# Altium PCB f407_oled_display.PcbDoc
Units mm, origin at the board's own origin, x right, y up, seen from the top; angles counter-clockwise.
Board outline 105 x 80.01 mm, 2 copper layers (Top Layer, Bottom Layer), stack 1.635 mm thick; 62 components, 96 nets, 338 pads, 187 vias.
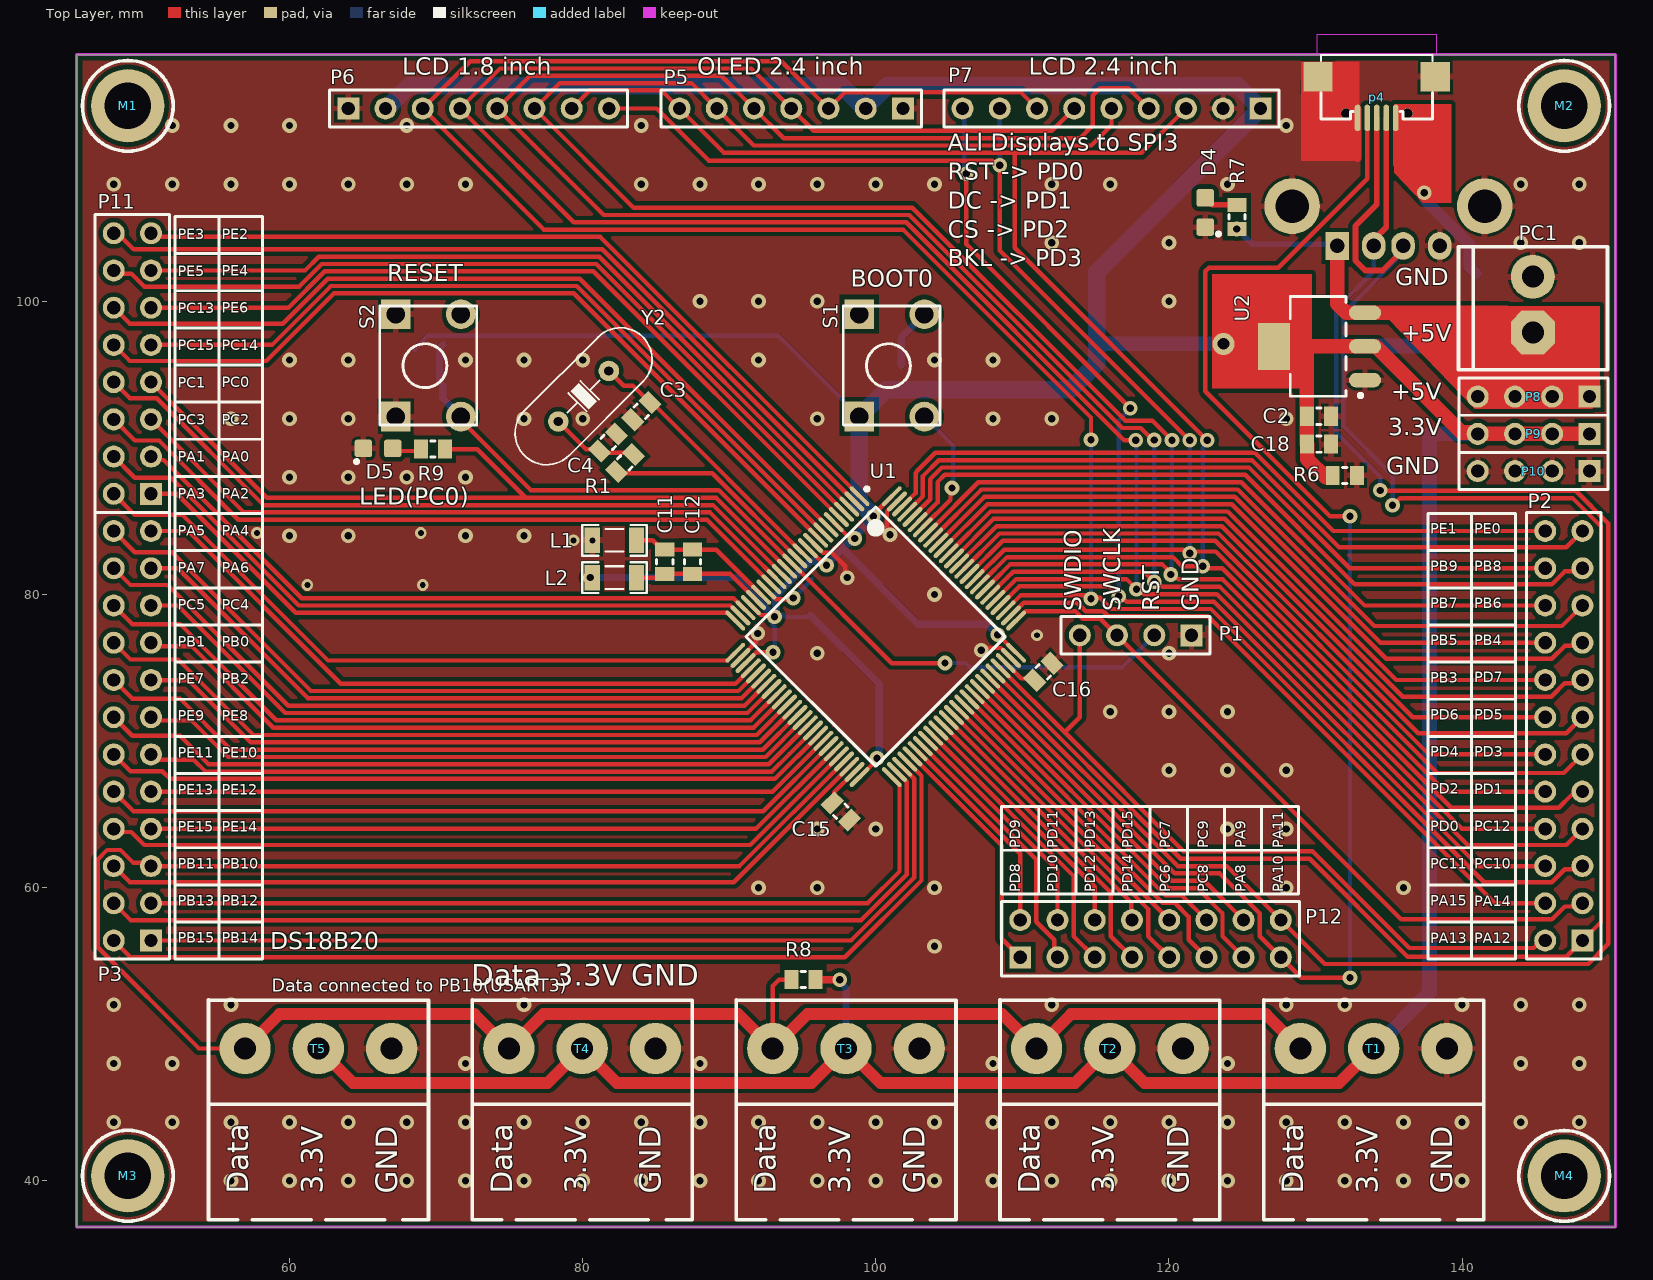
[diagram p0: Top Layer view]
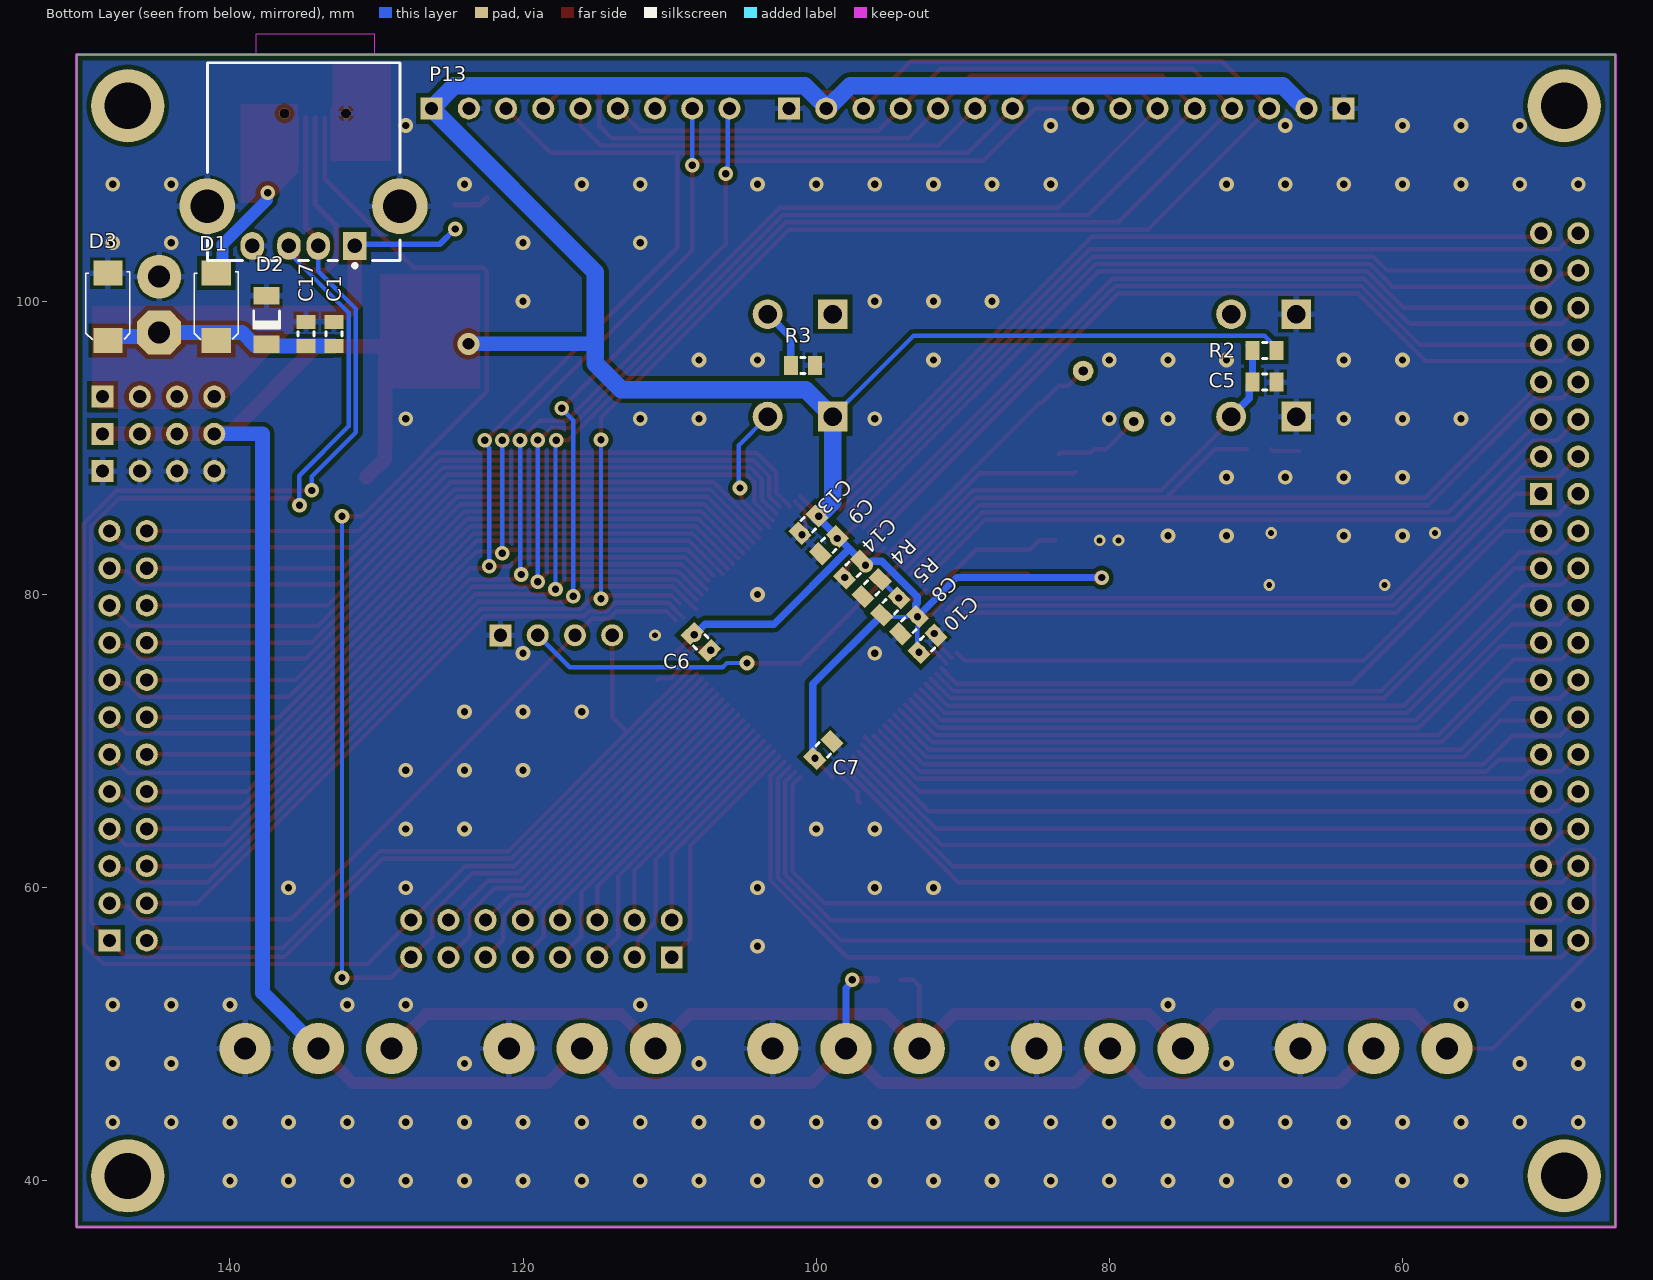
[diagram p1: Bottom Layer view, seen from below]
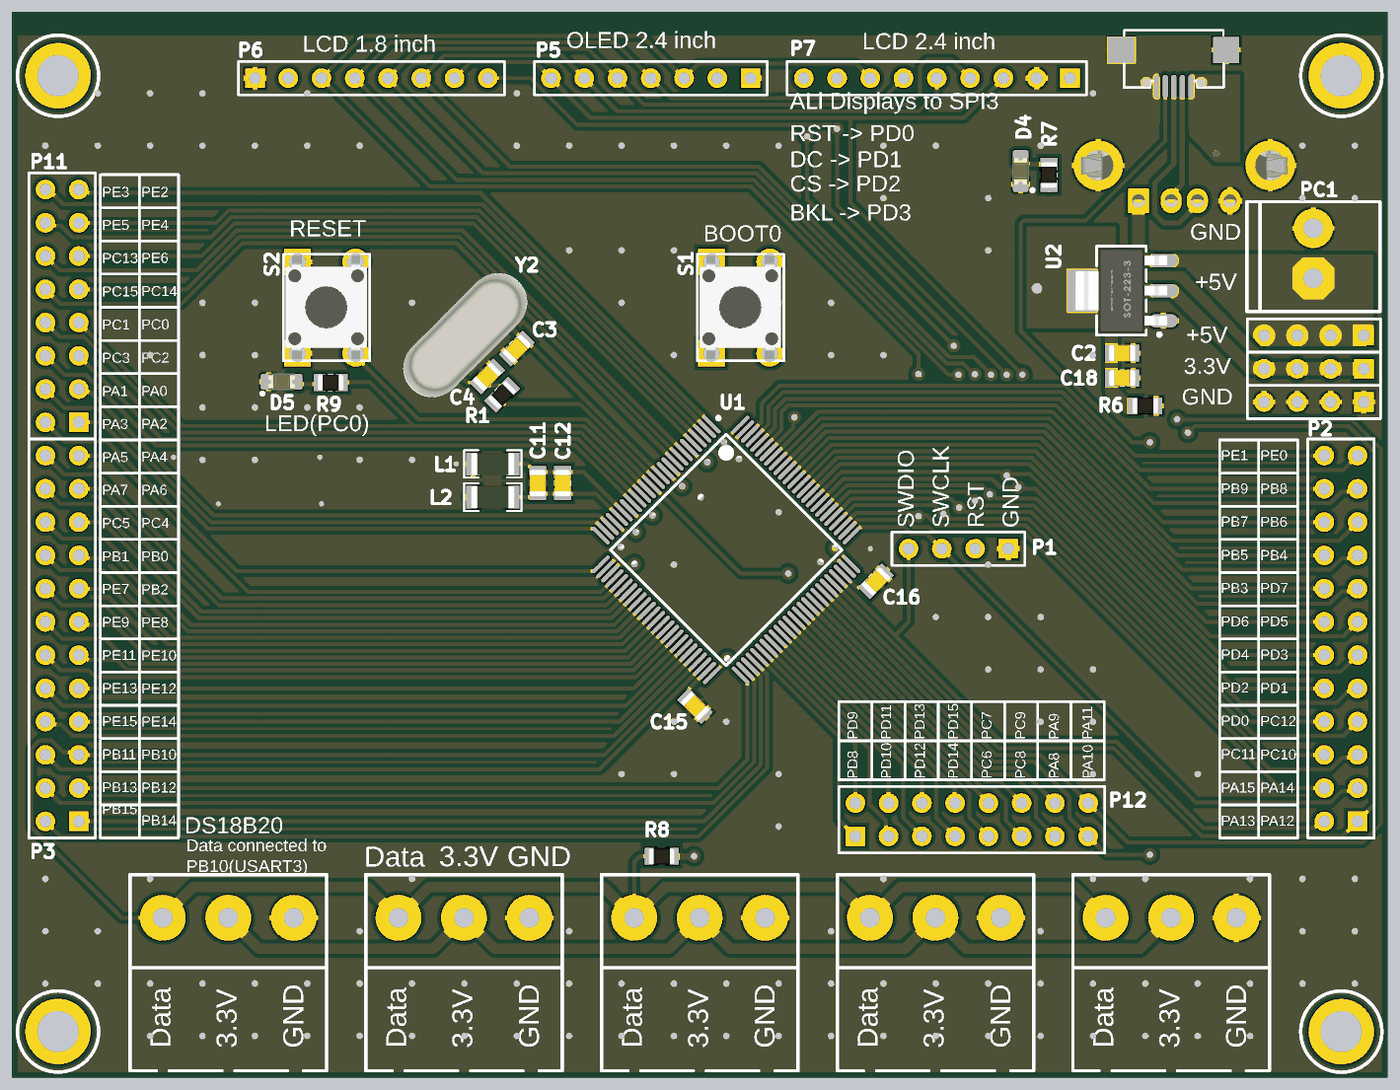
[diagram p2: 3D render of the assembled board from above, using the file's embedded part models]
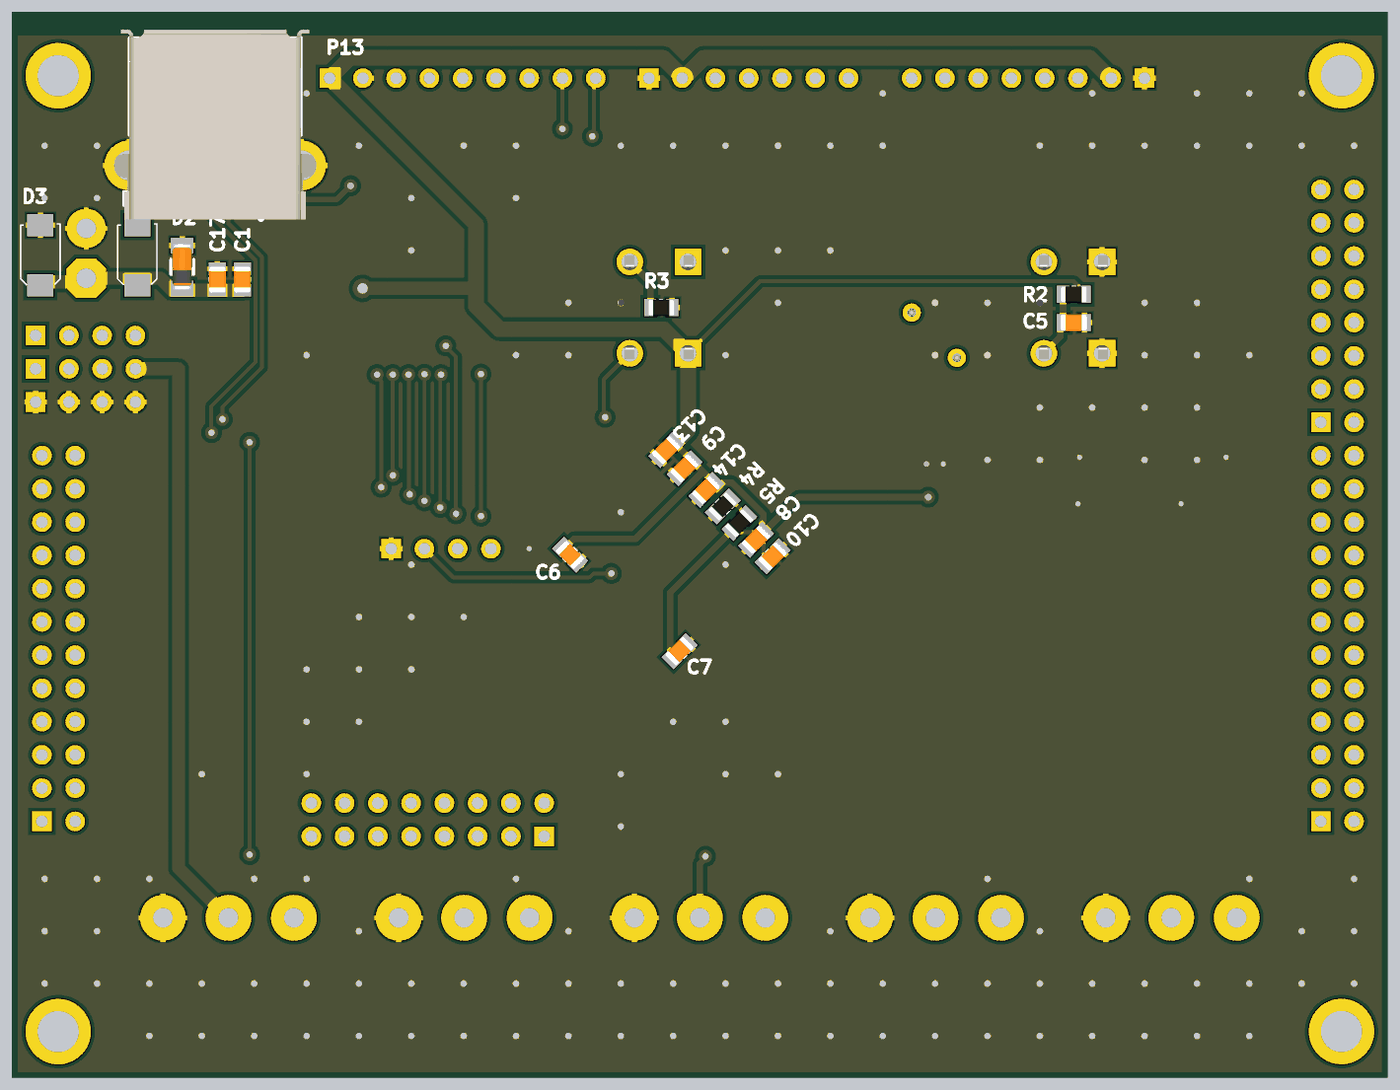
[diagram p3: 3D render of the assembled board from below, using the file's embedded part models]

## Layer stack, top to bottom
Top Solder: solder mask 0.0102, Solder Resist, Dk 3.5
Top Layer: signal copper 0.0175
Dielectric 1: dielectric 1.6, FR-4, Dk 4.8
Bottom Layer: signal copper 0.0175
Bottom Solder: solder mask 0.0102, Solder Resist, Dk 3.5

## Board outline
45.466,36.83 150.466,36.83 150.466,116.84 45.466,116.84

## Design rules (kind name [scope] priority, off if disabled: settings)
Clearance [All] p1: gap=0.2 ignorepadtopadclearanceinfootprint=FALSE except(0: Arc-Hole Track-Hole SMDPad-Hole THPad-Hole Via-Hole Fill-Hole Poly-Hole Region-Hole Text-Hole; 0.3: Arc-Fill Arc-Poly Arc-Region Track-Fill Track-Poly Track-Region SMDPad-Fill SMDPad-Poly SMDPad-Region THPad-Fill THPad-Poly THPad-Region Via-Fill Via-Poly Via-Region Fill-Fill Fill-Poly Fill-Region Poly-Poly Poly-Region Region-Region)
PolygonConnect [All] p1: thpad.connectstyle=Relief thpad.reliefconductorwidth=0.4 thpad.reliefentries=4 thpad.polygonreliefangle="90 Angle" thpad.airgapwidth=0.2 smdpad.connectstyle=Relief smdpad.reliefconductorwidth=0.4 smdpad.reliefentries=4 smdpad.polygonreliefangle="90 Angle" smdpad.airgapwidth=0.2 via.connectstyle=Direct via.reliefconductorwidth=0.254 via.reliefentries=4 via.polygonreliefangle="90 Angle" via.airgapwidth=0.254
RoomDefinition U_micro [InComponentClass('U_micro')] p1 off: confinementstyle=ConfineIn formatcopy=TRUE lockcomponents=FALSE outline 163.703,61.341 214.503,61.341 214.503,86.741 163.703,86.741
RoomDefinition U_display [InComponentClass('U_display')] p2 off: confinementstyle=ConfineIn formatcopy=TRUE lockcomponents=FALSE outline 168.529,30.861 219.329,30.861 219.329,56.261 168.529,56.261
RoomDefinition U_power [InComponentClass('U_power')] p3 off: confinementstyle=ConfineIn formatcopy=TRUE lockcomponents=FALSE outline 181.102,94.107 220.98,94.107 220.98,105.156 181.102,105.156
RoutingVias [All] p1: holewidth=0.5 width=1 viastyle="Through Hole" minholewidth=0.4 minwidth=0.8 maxholewidth=1 maxwidth=1.5
SolderMaskExpansion [All] p1: expansion=0.102 istentingtop=FALSE
Width [All] p1: maxlimit=2 minlimit=0.2 preferedwidth=0.3
30 further rules are at their usual default settings.

## Classes and differential pairs
net class PE[0..15]: PE0 PE1 PE2 PE3 PE4 PE5 PE6 PE7 PE8 PE9 PE10 PE11 PE12 PE13 PE14 PE15
net class PD[0..15]: PD0 PD1 PD2 PD3 PD4 PD5 PD6 PD7 PD8 PD9 PD10 PD11 PD12 PD13 PD14 PD15
net class PC[0..15]: PC0 PC1 PC2 PC3 PC4 PC5 PC6 PC7 PC8 PC9 PC10 PC11 PC12 PC13 PC14 PC15
net class PB[0..15]: PB0 PB1 PB2 PB3 PB4 PB5 PB6 PB7 PB8 PB9 PB10 PB11 PB12 PB13 PB14 PB15
net class PA[0..15]: PA0 PA1 PA2 PA3 PA4 PA5 PA6 PA7 PA8 PA9 PA10 PA11 PA12 PA13 PA14 PA15
component class U_power: C1 C2 C17 C18 D1 D2 D3 D4 M1 M2 M3 M4 p4 P8 P9 P10 P13 PC1 R6 R7 U2
component class U_micro: C3 C4 C5 C6 C7 C8 C9 C10 C11 C12 C13 C14 C15 C16 D5 L1 L2 P1 P2 P3 P11 P12 R1 R2 R3 R4 R5 R9 S1 S2 U1 Y2
component class U_display: P5 P6 P7 R8 T1 T2 T3 T4 T5

## Components (designator, comment, footprint, x,y, rotation, side; value= is the part's Value field where it differs from the comment)
C1 "cap 10uF" "Cap 805" 132.903,98.6 r270 bottom value=10uF
C2 "cap 22uF" "Cap 805" 131.062,92.161 r180 top value=22uF
C3 "cap 22pF" "Cap 805" 84.582,93.091 r225 top value=22pF
C4 "cap 22pF" "Cap 805" 82.32,90.956 r225 top value=22pF
C5 "cap 100nF" "Cap 805" 70.23,94.488 r180 bottom value=100nF
C6 "cap 100nF" "Cap 805" 107.291,76.176 r45 bottom value=100nF
C7 "cap 100nF" "Cap 805" 98.933,69.977 r315 bottom value=100nF
C8 "cap 100nF" "Cap 805" 94.258,77.319 r135 bottom value=100nF
C9 "cap 100nF" "Cap 805" 99.719,82.78 r135 bottom value=100nF
C10 "cap 100nF" "Cap 805" 91.821,77.216 r315 bottom value=100nF
C11 "cap 2.2uF" "Cap 805" 85.598,81.408 r90 top value=2.2uF
C12 "cap 100nF" "Cap 805" 87.503,81.408 r90 top value=100nF
C13 "cap 100nF" "Cap 805" 101.116,84.177 r135 bottom value=100nF
C14 "cap 1uF" "Cap 805" 98.068,81.129 r135 bottom value=1uF
C15 "cap 2.2uF" "Cap 805" 98.195,64.619 r135 top value=2.2uF
C16 "cap 2.2uF" "Cap 805" 112.014,75.311 r225 top value=2.2uF
C17 "cap 10uF" "Cap 805" 134.808,98.6 r270 bottom value=10uF
C18 "cap 22uF" "Cap 805" 131.062,90.256 r180 top value=22uF
D1 "1n5822" "SMA DIODE 2" 140.925,99.625 r270 bottom
D2 "Zener 5.6v" "Diode 1n4148 SMD" 137.5,100.375 r270 bottom
D3 "1n5822" "SMA DIODE 2" 148.325,99.625 r270 bottom
D4 "LED Red" 0805-LED 122.478,106.063 r270 top
D5 "LED Red" 0805-LED 66.04,89.966 r180 top
L1 "inductor 10uH" IND1206 82.169,83.693 r0 top value=10uH
L2 "inductor 10uH" IND1206 82.169,81.153 r0 top value=10uH
M1 "Spacer-ff 10mm" Screw 48.966,113.34 r0 top locked
M2 "Spacer-ff 10mm" screw 146.966,113.34 r0 top locked
M3 "Spacer-ff 10mm" screw 48.966,40.34 r0 top locked
M4 "Spacer-ff 10mm" screw 146.966,40.33 r0 top locked
P1 "Header4Pin Female" HDR1X4 121.539,77.216 r180 top
P2 "Header 12X2" HDR2X12 148.209,56.388 r90 top
P3 "Header 12X2" HDR2X12 50.546,56.388 r90 top
p4 "USB Connector" USB_AB_BM_SHS 134.176,113.916 r0 top
P5 "OLED 2.4" HDR1X7 101.854,113.157 r180 top
P6 "LCD_1.8" HDR1X8 64.008,113.157 r0 top
P7 "LCD_2.4" HDR1X9 126.238,113.157 r180 top
P8 "Header 4" HDR1X4 148.688,93.498 r180 top
P9 "Header 4" HDR1X4 148.688,90.958 r180 top
P10 "Header 4" HDR1X4 148.688,88.418 r180 top
P11 "Header 8X2" HDR2X8 50.546,86.868 r90 top
P12 "Header 8X2" HDR2X8 109.855,55.245 r0 top
P13 "USB Connector A Type Femal" USB2.5-2H4C 134.975,109.275 r90 bottom locked
PC1 "Power Connector" "My_ Power_Connector" 139.745,94.065 r90 top
R1 "Res 120R" "RES 0805 (2012X06L)" 82.296,88.392 r45 top value=120R
R2 "Res 1K" "RES 0805 (2012X06L)" 68.58,96.647 r0 bottom value=1K
R3 "Res 1K" "RES 0805 (2012X06L)" 100.077,95.631 r0 bottom value=1K
R4 "f429-f103" "RES 0805 (2012X06L)" 96.798,79.859 r135 bottom value=0R
R5 "f407" "RES 0805 (2012X06L)" 94.361,79.756 r315 bottom value=0R
R6 "Res 330R" "RES 0805 (2012X06L)" 132.825,88.125 r180 top value=330R
R7 "Res 4.7K" "RES 0805 (2012X06L)" 124.637,106.588 r270 top value=4.7K
R8 "Res 4.7K" "RES 0805 (2012X06L)" 94.234,53.721 r0 top value=4.7K
R9 "Res 4.7K" "RES 0805 (2012X06L)" 70.611,89.916 r180 top value=4.7K
S1 "Switch PB" "Switch - Push to On" 101.092,95.631 r90 top
S2 "Switch PB" "Switch - Push to On" 69.469,95.631 r90 top
T1 "Phoenix terminal" "phoenix terminal 3" 126.473,37.338 r0 top locked
T2 "Phoenix terminal" "phoenix terminal 3" 108.473,37.338 r0 top locked
T3 "Phoenix terminal" "phoenix terminal 3" 90.473,37.338 r0 top locked
T4 "Phoenix terminal" "phoenix terminal 3" 72.473,37.338 r0 top locked
T5 "Phoenix terminal" "phoenix terminal 3" 54.473,37.338 r0 top locked
U1 "STM32F103VET6" LQFP100_N 99.991,77.122 r315 top locked
U2 "AMS1117 3.3" SOT223 130.175,96.925 r180 top
Y2 "Crystal 16MHZ" "CRYSTAL Small" 80.063,93.525 r225 top

## Footprints (in the part's own frame and the unit in brackets; to place one, negate y for a bottom-side part, rotate by r counter-clockwise, add the part's x,y. Pads: shape width x height; smd on the part's side, far side on the other; paste and mask are expansions set on the pad)
0805-LED [mm]
  rrect30% 1.2x1.2 smd: A(-1,0) C(1,0)
  silkscreen extent 1.43,0.86 1.5,0.94, body extent -1.01,-0.63 1.01,0.62, height 1.1
"Cap 805" [mm]
  rect 0.95x1.3 smd: 1(0,0) 2(1.65,0)
  silkscreen extent 0.67,-0.55 0.97,0.55, body extent -0.19,-0.64 1.84,0.63, height 0.65
"CRYSTAL Small" [mil] "DESIGNER ABBAS BASEREH"
  round 55 hole 25: 1(-96.06,0) 2(96.06,0)
  silkscreen extent -225,-85 225,85, body extent -226,-89 226,89, height 142
"Diode 1n4148 SMD" [mm] "Mini MELF SOD-80"
  rect 1.2x1.75 smd: 1(0,0) 2(3.3,0)
  silkscreen extent 1.04,-0.88 2.22,0.87, body extent -0.13,-0.75 3.37,0.75, height 1.55
HDR1X4 [mm] "Connector; Header; 4 Position"
  rect 1.5x1.5 hole 0.9: 1(0,0)
  round 1.5 hole 0.9: 2(2.54,0) 3(5.08,0) 4(7.62,0)
  silkscreen extent -1.27,-1.27 8.89,1.27
HDR1X7 [mm] "Connector; Header; 7 Position"
  rect 1.5x1.5 hole 0.9: 1(0,0)
  round 1.5 hole 0.9: 2(2.54,0) 3(5.08,0) 4(7.62,0) 5(10.16,0) 6(12.7,0) 7(15.24,0)
  silkscreen extent -1.27,-1.27 16.51,1.27
HDR1X8 [mm] "Connector; Header; 8 Position"
  rect 1.5x1.5 hole 0.9: 1(0,0)
  round 1.5 hole 0.9: 2(2.54,0) 3(5.08,0) 4(7.62,0) 5(10.16,0) 6(12.7,0) 7(15.24,0) 8(17.78,0)
  silkscreen extent -1.27,-1.27 19.05,1.27
HDR1X9 [mm] "Connector; Header; 9 Position"
  rect 1.5x1.5 hole 0.9: 1(0,0)
  round 1.5 hole 0.9: 2(2.54,0) 3(5.08,0) 4(7.62,0) 5(10.16,0) 6(12.7,0) 7(15.24,0) 8(17.78,0) 9(20.32,0)
  silkscreen extent -1.27,-1.27 21.59,1.27
HDR2X8 [mm] "Connector; Header; 8x2 Position"
  rect 1.5x1.5 hole 0.9: 1(0,0)
  round 1.5 hole 0.9: 2(0,2.54) 3(2.54,0) 4(2.54,2.54) 5(5.08,0) 6(5.08,2.54) 7(7.62,0) 8(7.62,2.54) 9(10.16,0) 10(10.16,2.54) 11(12.7,0) 12(12.7,2.54) 13(15.24,0) 14(15.24,2.54) 15(17.78,0) 16(17.78,2.54)
  silkscreen extent -1.27,-1.27 19.05,3.81
HDR2X12 [mm] "Connector; Header; 12x2 Position"
  rect 1.5x1.5 hole 0.9: 1(0,0)
  round 1.5 hole 0.9: 2(0,2.54) 3(2.54,0) 4(2.54,2.54) 5(5.08,0) 6(5.08,2.54) 7(7.62,0) 8(7.62,2.54) 9(10.16,0) 10(10.16,2.54) 11(12.7,0) 12(12.7,2.54) 13(15.24,0) 14(15.24,2.54) 15(17.78,0) 16(17.78,2.54) 17(20.32,0) 18(20.32,2.54) 19(22.86,0) 20(22.86,2.54) 21(25.4,0) 22(25.4,2.54) 23(27.94,0) 24(27.94,2.54)
  silkscreen extent -1.27,-1.27 29.21,3.81
IND1206 [mm] "Chip Inductor, 2-Leads, Body 3/20x1/60mm, IPC Medium Density DESIGNER:ABBAS BASEREH"
  rect 1.04x1.74 smd: 1(-1.51,0) 2(1.51,0)
  silkscreen extent -2.2,-1.05 2.2,1.05, body extent -1.65,-0.85 1.65,0.85, height 0.94
LQFP100_N [mm] "Thin QFP, 100-Leads, Body 14x14mm, Pitch 0.5mm, IPC Medium Density"
  oval 1.8x0.3 smd: 1(-7.55,6) 2(-7.55,5.5) 3(-7.55,5) 4(-7.55,4.5) 5(-7.55,4) 6(-7.55,3.5) 7(-7.55,3) 8(-7.55,2.5) 9(-7.55,2) 10(-7.55,1.5) 11(-7.55,1) 12(-7.55,0.5) 13(-7.55,0) 14(-7.55,-0.5) 15(-7.55,-1) 16(-7.55,-1.5) 17(-7.55,-2) 18(-7.55,-2.5) 19(-7.55,-3) 20(-7.55,-3.5) 21(-7.55,-4) 22(-7.55,-4.5) 23(-7.55,-5) 24(-7.55,-5.5) 25(-7.55,-6) 51(7.55,-6) 52(7.55,-5.5) 53(7.55,-5) 54(7.55,-4.5) 55(7.55,-4) 56(7.55,-3.5) 57(7.55,-3) 58(7.55,-2.5) 59(7.55,-2) 60(7.55,-1.5) 61(7.55,-1) 62(7.55,-0.5) 63(7.55,0) 64(7.55,0.5) 65(7.55,1) 66(7.55,1.5) 67(7.55,2) 68(7.55,2.5) 69(7.55,3) 70(7.55,3.5) 71(7.55,4) 72(7.55,4.5) 73(7.55,5) 74(7.55,5.5) 75(7.55,6)
  oval 0.3x1.8 smd: 26(-6,-7.55) 27(-5.5,-7.55) 28(-5,-7.55) 29(-4.5,-7.55) 30(-4,-7.55) 31(-3.5,-7.55) 32(-3,-7.55) 33(-2.5,-7.55) 34(-2,-7.55) 35(-1.5,-7.55) 36(-1,-7.55) 37(-0.5,-7.55) 38(0,-7.55) 39(0.5,-7.55) 40(1,-7.55) 41(1.5,-7.55) 42(2,-7.55) 43(2.5,-7.55) 44(3,-7.55) 45(3.5,-7.55) 46(4,-7.55) 47(4.5,-7.55) 48(5,-7.55) 49(5.5,-7.55) 50(6,-7.55) 76(6,7.55) 77(5.5,7.55) 78(5,7.55) 79(4.5,7.55) 80(4,7.55) 81(3.5,7.55) 82(3,7.55) 83(2.5,7.55) 84(2,7.55) 85(1.5,7.55) 86(1,7.55) 87(0.5,7.55) 88(0,7.55) 89(-0.5,7.55) 90(-1,7.55) 91(-1.5,7.55) 92(-2,7.55) 93(-2.5,7.55) 94(-3,7.55) 95(-3.5,7.55) 96(-4,7.55) 97(-4.5,7.55) 98(-5,7.55) 99(-5.5,7.55) 100(-6,7.55)
  silkscreen extent -7.67,-6.25 6.25,6.82, body extent -7,-7 7,7, height 1.6
"My_ Power_Connector" [mm]
  oct 3x3 hole 1.5: 1(3.81,-5.08)
  round 3 hole 1.5: 2(7.62,-5.08)
  silkscreen extent 1.27,-10.17 9.65,-0.01
"phoenix terminal 3" [mm] "3 terminals"
  round 3.5 hole 1.5: 1(2.493,11.684) 2(7.493,11.684) 3(12.493,11.684)
  silkscreen extent 0,0 15,15
"RES 0805 (2012X06L)" [mm] "Chip Resistor, 2-Leads, Body 2.0x1.3mm, IPC High Density _ (0.100 W)"
  rect 0.95x1.3 smd: 1(0,0) 2(1.65,0)
  silkscreen extent 0.67,-0.55 0.98,0.55, body extent -0.19,-0.63 1.84,0.64, height 0.6
Screw [mm]
  round 5 hole 3.15 mask+0.1: S(0,0)
  silkscreen extent -3.1,-3.1 3.1,3.1
screw [mm]
  round 5 hole 3.15 mask+0.1: S(0,0)
  silkscreen extent -3.1,-3.1 3.1,3.1
"SMA DIODE 2" [mm]
  rect 1.7x2 smd: 1(-2.3,0) 2(2.3,0)
  silkscreen extent -2.4,-1.5 2.25,1.5, body extent -2.1,-1.3 2.1,1.3, height 0.55
SOT223 [mm] "SOT223, 4-Leads, Body 6.5x3.5mm, Pitch 2.30mm-Designer Abbas Basereh"
  oval 2.2x1 smd: 1(-3.2,2.3) 2(-3.2,0) 3(-3.2,-2.3)
  rect 2.2x3.2 smd: 4(3,0)
  Top Layer pour cut-out: -1.7,3.556 1.7,3.556 1.7,-3.556 -1.7,-3.556
  silkscreen extent -3.03,-3.4 1.9,3.47, body extent -3.5,-3.25 3.5,3.25, height 1.7
"Switch - Push to On" [mil]
  rect 80x80 hole 50: 1(-137.5,87.5) 1(137.5,87.5)
  round 80 hole 50: 2(-137.5,-87.5) 2(137.5,-87.5)
  silkscreen extent -160,-130 160,130, body extent -155,-121 157,123, height 205
USB2.5-2H4C [mm] "Connector; USB1.1, Type A, Thru-Hole; 4 Position; Right Angle DESIGNER ABBAS BASEREH"
  rect 1.9x1.6 hole 1: 1(-5.49,-3.5)
  oval 1.9x1.6 hole 1: 2(-5.49,-1) 3(-5.49,1) 4(-5.49,3.5)
  round 3.8 hole 2.3: 4(-2.78,-6.57) 4(-2.78,6.57)
  silkscreen extent -6.96,-6.57 7,6.57, body extent -6.9,-7.9 7.6,7.9, height 7.35
USB_AB_BM_SHS [mm] "USB Micro AB - Standard (Bottom mount), Shell SMT DESIGNER ABBAS BASEREH"
  oval 0.4x1.8 smd: 1(1.3,-1.4) 2(0.65,-1.4) 3(0,-1.4) 4(-0.65,-1.4) 5(-1.3,-1.4)
  rect 2x2 smd: 5(-4,1.4) 5(4,1.4)
  round 0.7 hole 0.7: H(-2.1,-1.1) H(2.1,-1.1)
  Keep-Out Layer board cut-out: -4.064,2.9 -4.064,4.291 4.064,4.291 4.064,2.9
  silkscreen extent -3.8,-1.47 3.8,2.9, body extent -4,-1.78 4,4.26, height 2.75

## Part data
C1 C2 C3 C4 C5 C6 C7 C8 C9 C10 C11 C12 C13 C14 C15 C16 C17 C18: library part Cap, "Capacitor", LatestRevisionDate=17-Jul-2002, LatestRevisionNote="Re-released for DXP Platform.", PackageDescription="Radial Cap, Thru-Hole; 2 Leads; 0.3 in Pin Spacing", PackageReference=RAD-0.3, Published=8-Jun-2000, Publisher="Altium Limited"
D1 D3: library part "Diode 1N4007", "1 Amp schottky Diode", Code_JEDEC=DO-204-AL, ComponentLink1Description="Manufacturer Link", ComponentLink1URL=http://www.fairchildsemi.com/, ComponentLink2Description=Datasheet, ComponentLink2URL=http://www.fairchildsemi.com/ds/1N%2F1N4001.pdf, DatasheetVersion=1998, LatestRevisionDate=17-Jul-2002, LatestRevisionNote="Re-released for DXP Platform.", PackageDescription="Diode, Axial; Body 5.2 x 2.7 mm (LxDia. max), Lead Dia. 0.86 mm (max)", PackageReference=DO-41, PackageVersion=Aug-1999, Published=8-Jun-2000, Publisher="Altium Limited"
D2: library part "D Zener", "Zener Diode", LatestRevisionDate=17-Jul-2002, LatestRevisionNote="Re-released for DXP Platform.", PackageDescription="Diode, Thru-Hole; 2 Leads; 0.7 in Pin Spacing", PackageReference=DIODE-0.7, Published=8-Jun-2000, Publisher="Altium Limited"
D4 D5: library part LED0, "LED SMD", LatestRevisionDate=08-Jul-2005, LatestRevisionNote="Mech Layer 1 removed.", PackageDescription="LED; 2 Leads", PackageReference=LED-0, Published=8-Jun-2000, Publisher="Altium Limited"
L1 L2: library part Inductor, "Inductor", Code_IEC=1005, Code_JEITA=0402, LatestRevisionDate=29-May-2009, LatestRevisionNote="IPC-7351 Footprint Added.", PackageDescription="Chip Inductor", PackageReference=0402-A, Published=8-Jun-2000, Publisher="Altium Limited"
M1 M2 M3 M4: library part "Board Screw", "Board Screw With Spacer"
P1: library part "Header 4", "Header, 4-Pin", LatestRevisionDate=17-Jul-2002, LatestRevisionNote="Re-released for DXP Platform.", Publisher="Altium Limited"
P2 P3: "Header, 12-Pin, Dual row", LatestRevisionDate=17-Jul-2002, LatestRevisionNote="Re-released for DXP Platform.", Publisher="Altium Limited"
p4: library part "USB MICRO", "USB Connector MICRO-B Type", Max Current=1600mA, Category=Connector, ComponentLink1Description=Datasheet, ComponentLink2Description=Reference, Designer="ABBAS BASEREH", Mounting Technology="Surface Mount\Through-Hole", Pin Count=5-7, Publisher="ABBAS BASEREH", Status=Unreleased, Update=1395-11-17
P5: library part "Header 7", "Header, 7-Pin", LatestRevisionDate=17-Jul-2002, LatestRevisionNote="Re-released for DXP Platform.", Publisher="Altium Limited"
P6: library part "Header 8", "Header, 8-Pin", LatestRevisionDate=17-Jul-2002, LatestRevisionNote="Re-released for DXP Platform.", Publisher="Altium Limited"
P7: library part "Header 9", "Header, 9-Pin", LatestRevisionDate=17-Jul-2002, LatestRevisionNote="Re-released for DXP Platform.", Publisher="Altium Limited"
P8 P9 P10: "Header, 4-Pin", LatestRevisionDate=17-Jul-2002, LatestRevisionNote="Re-released for DXP Platform.", Publisher="Altium Limited"
P11 P12: "Header, 8-Pin, Dual row", LatestRevisionDate=17-Jul-2002, LatestRevisionNote="Re-released for DXP Platform.", Publisher="Altium Limited"
P13: library part "USB A-Type", "USB Connector-A Type Femal"
PC1: "white Power Connector"
R1 R2 R3 R4 R5 R6 R7 R8 R9: library part Res1, "Resistor", LatestRevisionDate=17-Jul-2002, LatestRevisionNote="Re-released for DXP Platform.", PackageDescription="Axial Device, Thru-Hole; 2 Leads; 0.3 in Pin Spacing", PackageReference=AXIAL-0.3, Published=8-Jun-2000, Publisher="Altium Limited"
S1 S2: "Push Button Switch"
T1 T2 T3 T4 T5: library part "Phoenix terminal 3", "Terminal 3 Pin", ComponentLinkURL=www.picpars.com, Designer="Seyed Mohsen Ghasemain", E-mail=picpars@gmail.com
U1: library part STM32F103V8T6, "STM32 ARM-based 32-bit MCU with 64 Kbytes Flash, 100-pin LQFP, Industrial Temperature", ComponentLink1Description="Manufacturer Link", ComponentLink1URL=www.st.com/stm32, ComponentLink2Description=Datasheet, ComponentLink2URL=http://www.st.com/stonline/products/literature/ds/13587.pdf, DatasheetVersion="rev6, Mar-2008", PackageDescription="100-Pin Low-Profile Quad Flat Pack, 14 x 14 mm Body, 0.5 mm Pitch (LQFP100)", PackageReference=LQFP100, PackageVersion=Mar-2008, Published=30-May-2008, Publisher="Altium Limited"
U2: library part AMS1117, Package="SOT-223 Seeed Technology", Availability=Unavailable, MF="Seeed Technology", MP=AMS1117, Price=None, SnapEDA_Link=https://www.snapeda.com/parts/AMS1117/Seeed%20Technology%20Co.%2C%20Ltd/view-part/184428/?ref=snap
Y2: library part CRYSTAL, "Crystal"

## Via types
v1: diameter 1, hole 0.5, Top Layer to Bottom Layer, tented both sides, 179 vias
v2: diameter 0.8, hole 0.4, Top Layer to Bottom Layer, tented both sides, 7 vias
v3: diameter 1.5, hole 0.8, Top Layer to Bottom Layer, tented both sides, 1 vias

## Nets (pads, with @x,y where several pads share a name; then routed paths per layer and width w, separated by ;. In a path a pad name is that pad's centre, name@x,y a point inside that pad or via, vN(x,y) a via of type N, cw(c..) or ccw(c..) an arc to the next point about the centre after c; other vN are vias at no path point)
+3v3: C2.2 C6.2 C7.2 C8.2 C9.2 C10.2 C13.2 C14.2 C18.2 L2.1 P5.2 P6.2 P7.1 P9.1 P9.2 P9.3 P9.4 R2.1 R5.2 R6.2 R8.2 S1.1 T1.2 T2.2 T3.2 T4.2 T5.2 U1.6 U1.11 U1.22 U1.28 U1.50 U1.75 U1.100 U2.2 U2.4 | length 387.9
  Top Layer w0.3: U1.28 91.848,76.049 v1(92.988,76.049) ; U1.22 92.147,78.602 92.975,78.602 v1(93.091,78.486) ; U1.11 96.533,81.995 v1(96.632,81.995) ; U1.6 v1@98.109,83.954 ; U1.50 100.076,68.721 v1(100.076,68.834) ; v1(99.822,85.344) 99.822,85.438 U1.100 ; v1(108.31,77.256) 108.343,77.256 U1.75
  Top Layer w0.5: R8.2 v1(97.536,53.721)
  Top Layer w0.8: T5.2 64.316,46.672 77.616,46.672 T4.2 82.316,46.672 95.616,46.672 T3.2 100.316,46.672 113.616,46.672 T2.2 118.316,46.672 131.616,46.672 T1.2
  Top Layer w1: v1(80.518,81.153) L2.1 ; v3(123.725,97.1) 127,97.1 U2.4 129.425,96.925 ; 130.688,87.987 129.437,89.238 129.437,90.231 C18.2 C2.2 129.412,96.912 129.425,96.925 ; P9.1 P9.2 P9.3 P9.4 140.978,91.048 139.977,91.048 134.1,96.925 U2.2 129.425,96.925
  Bottom Layer w0.3: R2.1 68.58,96.822 69.405,97.647 93.361,97.647 S1.1@98.87,92.138 ; v1(92.988,76.049) 93.111,76.173 93.111,77.758 92.967,77.903 92.967,78.362 v1(93.091,78.486) ; C8.2@93.215,78.61 93.674,78.61 93.819,78.466 95.404,78.466 R5.2
  Bottom Layer w0.5: v1(80.518,81.153) 90.424,81.153 v1(93.091,78.486) 93.215,78.61 93.215,79.347 93.116,79.446 93.116,79.854 95.533,82.271 96.22,82.271 96.497,81.995 v1(96.632,81.995) ; R5.2 100.223,73.894 100.223,68.981 v1(100.076,68.834) ; C14.2@96.909,82.288 97.735,83.113 ; v1(97.536,53.721) 97.536,53.586 97.966,53.156 T3.2 ; v1(99.822,85.344) 99.822,85.201 98.497,83.875 97.735,83.113 ; v1(108.31,77.256) 107.591,77.975 102.873,77.975 97.735,83.113
  Bottom Layer w1: 115.062,97.5 115.462,97.1 v3(123.725,97.1) ; T1.2 137.775,52.831 137.775,90.958 P9.4
  Bottom Layer w1.2: P6.2 66.629,113.157 68.179,114.707 97.683,114.707 99.233,113.157 P5.2 99.314,113.238 100.304,114.228 100.304,114.238 100.773,114.707 124.688,114.707 P7.1 115.062,101.981 115.062,97.5 115.062,95.758 113.284,93.98 100.711,93.98 98.87,92.138 98.87,86.296 v1(99.822,85.344)
  other v1: 98.552,83.82
+5: C1.2 C17.2 D1.2 D2.2 D3.2 P8.1 P8.2 P8.3 P8.4 P13.1 PC1.1 R7.2 U2.3 | length 53.5
  Top Layer w1: P13.1 131.475,99.85 132.1,99.225 U2.3 143.018,99.225 144.368,97.875 PC1.1 144.878,97.822 144.878,93.498 ; P8.4 P8.3 144.878,93.498 ; P8.1 P8.2 144.878,93.498
  Bottom Layer w0.4: v1(124.637,104.938) 125.675,103.9 131.36,103.9 P13.1
  Bottom Layer w1: C1.2 C17.2 138.248,96.95 139.173,97.875 PC1.1 145.1,97.6 148.05,97.6 D3.2
+5_vbus: D1.1 p4.1 p4.H@136.276,112.816 | length 12.8
  Top Layer w0.4: p4.1 135.476,109.349 v1(137.425,107.4)
  Bottom Layer w0.8: v1(137.425,107.4) 137.463,107.362 137.463,106.937 140.5,103.9 140.5,102.35 D1.1
BOOT0: R3.2 S1.2 U1.94 | length 13.4
  Top Layer w0.3: U1.94 105.097,86.471 105.097,87.157 v1(105.2,87.26)
  Bottom Layer w0.3: S1.2@103.314,92.138 105.283,90.17 105.283,87.342 v1(105.2,87.26)
  Bottom Layer w0.5: R3.2 101.727,97.536 S1.2@103.314,99.123
GND: C1.1 C2.1 C3.2 C4.1 C5.2 C6.1 C7.1 C8.1 C9.1 C10.1 C13.1 C14.1 C15.1 C16.1 C17.1 C18.1 D2.1 D3.1 D4.C D5.C L1.1 P1.1 p4.5 p4.H@132.076,112.816 P5.1 P6.1 P7.2 P10.1 P10.2 P10.3 P10.4 P13.4 PC1.2 R3.1 R4.1 R6.1 S2.1 T1.3 T2.3 T3.3 T4.3 T5.3 U1.10 U1.27 U1.74 U1.99 U2.1 | length 14.3
  Top Layer w0.3: U1.27 91.814,76.723 91.814,77.209 v1(91.948,77.343) ; U1.10 96.39,82.845 96.984,82.845 97.91,81.919 97.91,81.287 v1(98.044,81.153) ; v1(100.965,84.074) 100.965,84.263 100.764,84.464 100.764,85.673 U1.99 ; v1(107.188,76.2) 107.377,76.2 107.527,76.349 108.542,76.349 U1.74 ; 132.842,109.728 132.876,109.762
  Top Layer w0.5: 132.876,109.762 132.876,112.516 p4.5@132.876,113.157
  other v1: 56,40 60,40 64,40 68,40 72,40 76,40 80,40 84,40 88,40 92,40 96,40 100,40 104,40 108,40 112,40 116,40 120,40 124,40 128,40 132,40 136,40 140,40 48,44 52,44 56,44 60,44 64,44 68,44 72,44 76,44 80,44 84,44 88,44 92,44 96,44 100,44 104,44 108,44 112,44 116,44 120,44 124,44 128,44 132,44 136,44 140,44 144,44 148,44 48,48 52,48 72,48 88,48 108,48 124,48 144,48 148,48 48,52 56,52 76,52 112,52 128,52 132,52 140,52 144,52 148,52 104,56 92,60 96,60 104,60 128,60 136,60 96,64 100,64 124,64 128,64 120,68 124,68 128,68 116,72 120,72 124,72 96,76 120,76 104,80 60,84 64,84 72,84 76,84 60,88 64,88 68,88 72,88 56,92 60,92 64,92 76,92 80,92 96,92 108,92 112,92 128,92 60,96 64,96 72,96 76,96 80,96 92,96 104,96 108,96 88,100 92,100 96,100 120,100 112,104 120,104 144,104 148,104 48,108 52,108 56,108 60,108 64,108 68,108 72,108 84,108 88,108 92,108 96,108 100,108 104,108 112,108 116,108 124,108 144,108 148,108 52,112 56,112 60,112 68,112 84,112 128,112
  other v2: 110.998,77.216 61.214,80.645 69.088,80.645 79.375,83.693 80.659,83.693 57.785,84.201 68.961,84.201
NetC3_1: C3.1 U1.12 Y2.1 | length 18.4
  Top Layer w0.3: Y2.1 82.796,94.242 83.431,94.242 C3.1 84.729,93.091 U1.12
NetC4_2: C4.2 R1.2 Y2.2 | length 6.1
  Top Layer w0.3: Y2.2 80.224,89.913 81.029,89.913 C4.2 81.277,89.665 82.862,89.665 82.879,89.682 83.339,89.682 R1.2
NetC15_2: C15.2 U1.49 | length 2.7
  Top Layer w0.3: C15.2 97.152,65.91 97.152,66.504 U1.49
NetC16_2: C16.2 U1.73 | length 2.5
  Top Layer w0.3: U1.73 109.916,74.268 110.724,74.268 C16.2
NetD4_1: D4.A R7.1 | length 2.4
  Top Layer w0.4: D4.A 122.953,106.588 R7.1
NetD5_1: D5.A R9.2 | length 2
  Top Layer w0.3: D5.A@67.04,89.789 68.834,89.789 R9.2
NetR1_1: R1.1 U1.13 | length 14.8
  Top Layer w0.3: R1.1 82.42,88.268 88.845,88.268 U1.13
NetR4_2: R4.2 R5.1 U1.19 | length 3.9
  Top Layer w0.3: U1.19 93.208,79.663 94.268,79.663 v1(94.361,79.756)
  Bottom Layer w0.3: v1(94.361,79.756) R4.2
PA0: P11.3 U1.23 | length 44.9
  Top Layer w0.3: P11.3 50.776,89.178 51.411,89.178 60.841,79.748 90.294,79.748 U1.23
PA1: P11.4 U1.24 | length 48
  Top Layer w0.3: P11.4 49.446,87.968 51.914,87.968 60.634,79.248 90.087,79.248 U1.24@91.272,78.064
PA2: P11.1 U1.25 | length 43.4
  Top Layer w0.3: P11.1 52.307,86.868 60.426,78.748 89.88,78.748 U1.25
PA3: P11.2 U1.26 | length 47.3
  Top Layer w0.3: P11.2 49.446,85.428 52.693,85.428 62.625,75.496 89.88,75.496 U1.26
PA4: P3.23 U1.29 | length 45.7
  Top Layer w0.3: P3.23 53.086,84.328 63.5,73.914 90.419,73.914 U1.29
PA5: P3.24 U1.30 | length 48.8
  Top Layer w0.3: P3.24 49.446,82.888 51.986,82.888 61.46,73.414 90.626,73.414 U1.30
PA6: P3.21 U1.31 | length 45.9
  Top Layer w0.3: P3.21 52.379,81.788 61.253,72.914 90.834,72.914 U1.31
PA7: P3.22 U1.32 | length 49
  Top Layer w0.3: P3.22 49.149,80.645 51.689,80.645 59.92,72.414 91.041,72.414 U1.32
PA8: P12.13 U1.67 | length 26.7
  Top Layer w0.3: U1.67 119.974,59.968 121.928,59.968 123.655,58.241 123.655,56.685 P12.13
PA9: P12.14 U1.68 | length 24.5
  Top Layer w0.3: U1.68 120.181,60.468 122.412,60.468 P12.14
PA10: p4.4 P12.15 U1.69 | length 105
  Top Layer w0.3: U1.69 120.388,60.968 123.468,60.968 126.195,58.241 126.195,56.685 P12.15 129.032,53.848 v1(132.352,53.848) ; v1(132.352,85.344) 130.995,85.344 122.475,93.864 122.475,102.049 122.726,102.3 127.463,102.3 133.526,108.363 p4.4
  Bottom Layer w0.3: v1(132.352,53.848) v1(132.352,85.344)
PA11: p4.2 P12.16 P13.2 U1.70 | length 124.1
  Top Layer w0.3: U1.70 120.595,61.468 123.952,61.468 P12.16 130.632,54.788 148.604,54.788 149.979,56.163 149.979,84.844 147.748,87.075 134.45,87.075 v1(134.425,87.1)
  Top Layer w0.4: P13.2 133.975,104.213 134.826,105.064 p4.2
  Bottom Layer w0.3: P13.2 133.975,102.05 131.403,99.478 131.403,91.072 134.425,88.05 v1(134.425,87.1)
PA12: P2.1 p4.3 P13.3 U1.71 | length 128
  Top Layer w0.3: U1.71 120.802,61.968 129.603,61.968 136.283,55.288 147.109,55.288 P2.1 149.479,57.658 149.479,84.637 147.541,86.575 135.783,86.575 135.289,86.08 v1(135.258,86.08)
  Top Layer w0.4: p4.3 134.176,106.601 132.725,105.15 132.725,102.775 133.4,102.1 134.575,102.1 135.975,103.5 P13.3
  Bottom Layer w0.3: v1(135.258,86.08) 135.275,86.098 135.275,88.1 131.903,91.472 131.903,99.22 135.975,103.292 P13.3
PA13: P1.4 P2.2 U1.72 | length 52.3
  Top Layer w0.3: U1.72 112.884,70.593 ; P1.4 113.919,71.628 112.884,70.593 ; P2.2 145.401,56.388 144.893,55.88 136.398,55.88 129.794,62.484 120.993,62.484 112.884,70.593
PA14: P1.3 P2.3 U1.76 | length 48.1
  Top Layer w0.3: U1.76 110.222,78.867 113.605,78.867 114.122,78.35 115.308,78.35 116.442,77.216 P1.3 135.847,57.828 146.125,57.828 147.009,58.712 147.993,58.712 P2.3
PA15: P2.4 U1.77 | length 45.5
  Top Layer w0.3: U1.77@109.05,78.402 110.085,79.438 113.741,79.438 114.329,78.85 115.515,78.85 115.855,78.51 122.658,78.51 142.24,58.928 P2.4
PB0: P3.17 U1.35 | length 46.3
  Top Layer w0.3: P3.17@50.508,76.708 50.738,76.478 53.316,76.478 58.88,70.914 91.662,70.914 U1.35
PB1: P3.18 U1.36 | length 49.4
  Top Layer w0.3: P3.18 49.149,75.565 52.396,75.565 57.547,70.414 91.869,70.414 U1.36
PB2: P3.15 U1.37 | length 46.4
  Top Layer w0.3: P3.15 50.554,74.16 53.094,74.16 57.34,69.914 92.076,69.914 U1.37
PB3: P2.16 U1.89 | length 46.6
  Top Layer w0.3: U1.89 107.824,85.662 124.015,85.662 135.509,74.168 P2.16
PB4: P2.17 U1.90 | length 49.7
  Top Layer w0.3: U1.90 107.617,86.162 124.277,86.162 134.831,75.608 146.125,75.608 147.009,76.492 147.993,76.492 P2.17
PB5: P2.18 U1.91 | length 46.8
  Top Layer w0.3: U1.91 107.41,86.662 124.484,86.662 134.438,76.708 P2.18
PB6: P2.19 U1.92 | length 50.1
  Top Layer w0.3: U1.92 107.203,87.162 124.691,87.162 134.002,77.851 146.812,77.851 P2.19
PB7: P2.20 U1.93 | length 46.7
  Top Layer w0.3: U1.93@103.774,84.44 106.996,87.662 124.936,87.662 133.35,79.248 P2.20
PB8: P2.21 U1.95 | length 50.9
  Top Layer w0.3: U1.95@102.94,85.02 104.215,86.296 104.215,87.668 104.71,88.162 125.198,88.162 132.672,80.688 146.125,80.688 147.009,81.572 147.993,81.572 P2.21
PB9: P2.22 U1.96 | length 47.9
  Top Layer w0.3: U1.96@102.713,85.501 103.715,86.503 103.715,87.875 104.503,88.662 125.46,88.662 132.334,81.788 P2.22
PB10: P3.5 R8.1 T1.1 T2.1 T3.1 T4.1 T5.1 U1.47 | length 159.2
  Top Layer w0.3: T5.1 53.816,49.022 46.906,55.932 46.906,61.924 47.55,62.568 48.462,62.568 49.346,61.684 50.33,61.684 P3.5 90.701,61.468 U1.47@97.929,68.695 ; T3.1 92.966,53.293 93.394,53.721 R8.1
  Top Layer w0.8: T5.1 59.316,51.372 72.616,51.372 T4.1 77.316,51.372 90.616,51.372 T3.1 95.316,51.372 108.616,51.372 T2.1 113.316,51.372 126.616,51.372 T1.1
PB11: P3.6 U1.48 | length 54.4
  Top Layer w0.3: P3.6 49.106,60.368 90.308,60.368 U1.48 U1.48@98.536,68.596
PB12: P3.3 U1.51 | length 58.6
  Top Layer w0.3: P3.3 99.441,58.928 101.618,61.105 101.618,67.01 U1.51
PB13: P3.4 U1.52 | length 63.2
  Top Layer w0.3: P3.4 49.149,57.785 99.005,57.785 102.118,60.898 102.118,67.218 U1.52
PB14: P3.1 U1.53 | length 61.8
  Top Layer w0.3: P3.1 98.315,56.388 102.618,60.69 102.618,67.425 U1.53
PB15: P3.2 U1.54 | length 66.3
  Top Layer w0.3: P3.2 49.149,55.245 97.879,55.245 103.118,60.483 103.118,67.632 U1.54
PC0: P11.7 R9.1 U1.15 | length 55.6
  Top Layer w0.3: P11.7 58.436,86.598 75.974,86.598 76.122,86.598 ; R9.1 72.804,89.916 76.122,86.598 ; U1.15 89.101,86.598 77.724,86.598 77.575,86.598 76.122,86.598
PC1: P11.8 U1.16 | length 51
  Top Layer w0.3: P11.8 49.106,93.388 50.939,93.388 58.229,86.098 88.894,86.098 U1.16
PC2: P11.5 U1.17 | length 47
  Top Layer w0.3: P11.5 56.896,85.598 88.687,85.598 91.559,82.726 U1.17@93.111,81.173
PC3: P11.6 U1.18 | length 49.5
  Top Layer w0.3: P11.6 49.446,90.508 51.097,90.508 56.507,85.098 88.48,85.098 91.059,82.519 U1.18
PC4: P3.19 U1.33 | length 46.1
  Top Layer w0.3: P3.19 52.379,79.248 59.713,71.914 91.248,71.914 U1.33
PC5: P3.20 U1.34 | length 49.2
  Top Layer w0.3: P3.20 49.276,77.978 52.523,77.978 59.087,71.414 91.455,71.414 U1.34
PC6: P12.9 U1.63 | length 22.6
  Top Layer w0.3: U1.63 118.575,58.538 118.575,56.685 P12.9
PC7: P12.10 U1.64 | length 20.3
  Top Layer w0.3: U1.64 120.015,57.805 P12.10
PC8: P12.11 U1.65 | length 24.6
  Top Layer w0.3: U1.65 119.56,58.968 120.388,58.968 121.357,57.999 121.357,56.443 P12.11
PC9: P12.12 U1.66 | length 22.4
  Top Layer w0.3: U1.66 119.767,59.468 120.872,59.468 P12.12
PC10: P2.5 P5.3 P6.3 P7.7 U1.78 | length 160
  Top Layer w0.3: U1.78@109.331,79.391 109.878,79.938 114.254,79.938 114.491,79.7 v1(114.681,79.7) ; P7.7 109.898,114.257 97.874,114.257 P5.3 93.541,116.39 72.321,116.39 P6.3 77.351,104.894 101.862,104.894 114.681,92.075 v1(114.681,90.551) ; v1@114.62,79.7 114.693,79.773 115.299,79.773 116.062,79.01 122.865,79.01 141.507,60.368 146.125,60.368 147.009,61.252 147.993,61.252 P2.5
  Bottom Layer w0.3: v1(114.681,79.7) v1(114.681,90.551)
PC11: P2.6 P7.9 U1.79 | length 84.3
  Top Layer w0.3: v1(106.172,108.712) 106.172,103.907 v1(117.367,92.712) ; U1.79@108.216,78.982 109.783,80.55 115.91,80.55 116.577,79.883 116.739,79.883 117.112,79.51 123.072,79.51 141.114,61.468 P2.6
  Bottom Layer w0.3: P7.9 106.045,113.03 106.045,108.839 v1(106.172,108.712) ; v1(116.586,79.883) 116.586,91.882 117.367,92.663 v1(117.367,92.712)
PC12: P2.7 P5.4 P6.4 P7.6 U1.80 | length 159.7
  Top Layer w0.3: U1.80 109.576,81.05 117.098,81.05 v1(117.788,80.36) 117.978,80.36 118.32,80.018 123.271,80.018 140.381,62.908 147.109,62.908 P2.7 ; P7.6 112.014,111.633 95.758,111.633 P5.4 91.501,115.89 74.361,115.89 P6.4 79.391,105.394 102.069,105.394 116.951,90.512 v1(117.729,90.512)
  Bottom Layer w0.3: v1(117.729,90.512) 117.788,90.453 v1(117.788,80.36)
PC13: P11.12 U1.7 | length 57.5
  Top Layer w0.3: P11.12 49.106,98.468 59.534,98.468 62.614,101.548 79.808,101.548 U1.7
PC14: P11.9 U1.8 | length 54.5
  Top Layer w0.3: P11.9 58.801,97.028 62.821,101.048 79.601,101.048 90.297,90.352 U1.8
PC15: P11.10 U1.9 | length 57.3
  Top Layer w0.3: P11.10 49.106,95.928 58.408,95.928 63.028,100.548 79.394,100.548 89.797,90.145 U1.9
PD0: P2.8 P5.5 P6.5 P7.4 U1.81 | length 159.9
  Top Layer w0.3: U1.81 108.972,81.153 109.369,81.55 118.317,81.55 v1(118.999,80.868) ; P7.4 117.221,114.554 115.316,114.554 114.808,114.046 114.808,112.014 113.927,111.133 93.718,111.133 P5.5 89.461,115.39 76.401,115.39 P6.5 81.431,105.894 102.276,105.894 116.808,91.362 118.081,91.362 118.902,90.541 v1(118.989,90.541) ; v1@118.999,80.772 119.284,80.772 119.538,80.518 123.478,80.518 139.988,64.008 P2.8
  Bottom Layer w0.3: v1(118.989,90.541) 118.994,90.536 118.994,80.873 v1(118.999,80.868)
PD1: P2.9 P5.6 P6.6 P7.5 U1.82 | length 154.4
  Top Layer w0.3: U1.82 107.982,80.87 109.162,82.05 119.554,82.05 v1@120.142,81.462 ; P7.5 116.078,112.014 114.697,110.633 91.678,110.633 P5.6 87.421,114.89 78.441,114.89 P6.6 83.471,106.394 102.483,106.394 117.015,91.862 118.87,91.862 120.212,90.519 v1(120.212,90.513) ; v1(120.121,81.368) 120.311,81.368 120.653,81.026 123.678,81.026 139.256,65.448 146.601,65.448 147.471,66.318 147.979,66.318 P2.9
  Bottom Layer w0.3: v1(120.121,81.368) 120.195,81.442 120.195,90.496 v1(120.212,90.513)
PD2: P2.10 P5.7 P6.7 P7.3 U1.83 | length 124.8
  Top Layer w0.3: P6.7 80.481,114.39 85.381,114.39 P5.7 89.638,110.133 109.475,110.133 ; U1.83@107.373,80.968 108.955,82.55 120.269,82.55 120.904,81.915 v1(122.301,81.915) 122.435,81.781 123.63,81.781 138.863,66.548 P2.10 ; P7.3 118.134,110.133 109.475,110.133 ; v1(122.616,90.512) 109.475,103.653 109.475,110.133
  Bottom Layer w0.3: v1(122.301,81.915) 122.301,90.008 122.616,90.323 v1(122.616,90.512)
PD3: P2.11 P6.8 P7.8 U1.84 | length 112.8
  Top Layer w0.3: P6.8 85.058,113.157 88.614,109.601 107.951,109.601 108.269,109.283 v1(108.458,109.283) 108.458,103.47 v1(121.413,90.512) v1(121.413,90.512) ; U1.84@107.019,81.322 108.756,83.058 120.977,83.058 121.223,82.812 v1(121.412,82.812) ; v1@121.412,82.931 123.19,82.931 138.303,67.818 146.939,67.818 P2.11
  Bottom Layer w0.3: v1(108.458,109.283) P7.8 ; v1(121.412,82.812) 121.414,82.814 v1(121.413,90.512)
PD4: P2.12 U1.85 | length 46.3
  Top Layer w0.3: U1.85 108.653,83.662 123.166,83.662 137.74,69.088 P2.12
PD5: P2.13 U1.86 | length 49.3
  Top Layer w0.3: U1.86 108.446,84.162 123.373,84.162 137.007,70.528 147.109,70.528 P2.13
PD6: P2.14 U1.87 | length 46.4
  Top Layer w0.3: U1.87 108.238,84.662 123.601,84.662 136.635,71.628 P2.14
PD7: P2.15 U1.88 | length 49.5
  Top Layer w0.3: U1.88 108.031,85.162 123.808,85.162 135.945,73.025 146.082,73.025 147.009,73.952 147.993,73.952 P2.15
PD8: P12.1 U1.55 | length 16.8
  Top Layer w0.3: U1.55 108.585,62.872 108.585,56.515 P12.1
PD9: P12.2 U1.56 | length 14.4
  Top Layer w0.3: U1.56 109.855,62.309 P12.2
PD10: P12.3 U1.57 | length 18.2
  Top Layer w0.3: U1.57 110.955,61.916 110.955,57.669 112.179,56.445 112.179,55.461 P12.3
PD11: P12.4 U1.58 | length 15.9
  Top Layer w0.3: U1.58 112.395,61.183 P12.4
PD12: P12.5 U1.59 | length 19.7
  Top Layer w0.3: U1.59 113.495,60.79 113.495,56.685 P12.5
PD13: P12.6 U1.60 | length 17.4
  Top Layer w0.3: U1.60 114.935,60.057 P12.6
PD14: P12.7 U1.61 | length 21.2
  Top Layer w0.3: U1.61 116.035,59.664 116.035,56.685 P12.7
PD15: P12.8 U1.62 | length 18.8
  Top Layer w0.3: U1.62 117.421,58.985 117.421,57.839 P12.8
PE0: P2.23 U1.97 | length 50.8
  Top Layer w0.3: U1.97@102.487,85.981 103.215,86.71 103.215,88.082 104.296,89.162 125.667,89.162 131.601,83.228 147.109,83.228 P2.23
PE1: P2.24 U1.98 | length 48.4
  Top Layer w0.3: U1.98 102.715,86.917 102.715,88.289 102.798,88.372 102.798,88.405 104.055,89.662 125.874,89.662 131.208,84.328 P2.24
PE2: P11.15 U1.1 | length 56.1
  Top Layer w0.3: P11.15 50.776,104.418 51.297,104.418 51.322,104.394 81.205,104.394 U1.1@99.086,86.513
PE3: P11.16 U1.2 | length 58.4
  Top Layer w0.3: P11.16 48.26,104.648 49.36,103.548 81.344,103.548 U1.2@98.732,86.159
PE4: P11.13 U1.3 | length 55.4
  Top Layer w0.3: P11.13 61.053,102.108 61.993,103.048 81.136,103.048 U1.3@98.379,85.806
PE5: P11.14 U1.4 | length 57.9
  Top Layer w0.3: P11.14 48.222,101.892 49.206,101.892 50.09,101.008 60.66,101.008 62.2,102.548 80.929,102.548 U1.4
PE6: P11.11 U1.5 | length 54.9
  Top Layer w0.3: P11.11 59.927,99.568 62.407,102.048 80.722,102.048 U1.5
PE7: P3.16 U1.38 | length 49.6
  Top Layer w0.3: P3.16 49.276,72.898 52.523,72.898 56.007,69.414 92.283,69.414 U1.38
PE8: P3.13 U1.39 | length 46.7
  Top Layer w0.3: P3.13@50.502,71.755 50.859,71.398 53.316,71.398 55.8,68.914 92.49,68.914 U1.39
PE9: P3.14 U1.40 | length 49.8
  Top Layer w0.3: P3.14 49.276,70.358 52.523,70.358 54.467,68.414 92.698,68.414 U1.40
PE10: P3.11 U1.41 | length 46.8
  Top Layer w0.3: P3.11 50.871,69.088 51.229,68.73 53.444,68.73 54.26,67.914 92.905,67.914 94.079,69.088 U1.41
PE11: P3.12 U1.42 | length 50
  Top Layer w0.3: P3.12 49.149,67.945 51.308,67.945 51.839,67.414 93.112,67.414 U1.42
PE12: P3.9 U1.43 | length 47.7
  Top Layer w0.3: P3.9 92.953,66.548 U1.43@96.705,70.3
PE13: P3.10 U1.44 | length 51.3
  Top Layer w0.3: P3.10 49.352,65.202 92.314,65.202 U1.44@96.868,69.756
PE14: P3.7 U1.45 | length 48.8
  Top Layer w0.3: P3.7 91.827,64.008 U1.45
PE15: P3.8 U1.46 | length 52.4
  Top Layer w0.3: P3.8 48.222,63.792 49.206,63.792 50.09,62.908 91.434,62.908 U1.46
RST: C5.1 P1.2 R2.2 S2.2 U1.14 | length 61.5
  Top Layer w0.3: S2.2@71.691,92.138 71.691,91.885 76.454,87.122 89.284,87.122 U1.14 101.095,75.311 104.711,75.311 v1(104.725,75.325)
  Bottom Layer w0.3: v1(104.725,75.325) 106.093,75.325 106.388,75.031 116.814,75.031 P1.2
  Bottom Layer w0.5: R2.2@70.455,97.047 70.23,96.822 C5.1 70.443,94.275 70.443,93.387 S2.2@71.691,92.138 ; S2.2@71.398,98.83 S2.2@71.691,99.123
Vref+: C11.1 C12.1 L2.2 U1.21 | length 9
  Top Layer w0.3: L2.2 85.343,81.153 C11.1 C12.1 90.049,81.408 U1.21
Vref-: C11.2 C12.2 L1.2 U1.20 | length 10
  Top Layer w0.3: L1.2 84.788,83.693 85.423,83.058 C11.2 C12.2 89.106,83.058 U1.20
pads on no net: M1.S M2.S M3.S M4.S

## Polygon pours and split planes (outlines as drawn)
GND on Top Layer "GND_L01_P000" (solid, pour order 0): 45.7,116.537 150.729,116.537 150.729,36.4 45.7,36.4
GND on Bottom Layer "GND_L02_P001" (solid, pour order 1): 45.425,116.637 150.454,116.637 150.454,36.5 45.425,36.5

## Keep-outs
Keep-Out Layer:
  the board outline again, w0.2

## Other copper
Top Layer:
  rectangle net +3v3: 122.925,94.05 129.75,101.85
  region net +5: 149.4,93.2 148.875,92.675 140.85,92.675 135,98.775 135,99.675 149.4,99.675
  region net +5_vbus: 135.375,113.45 135.375,108.775 137.3,106.725 139.25,106.725 139.25,113.45
  region net GND: 132.969,109.601 129.032,109.601 129.032,114.554 129.032,116.332 132.969,116.332

## Silkscreen, mask and mechanical layers (free items; w line width, h text height)
Top Overlay:
  lines w0.2: 52.197,57.652 58.166,57.652 ; 52.197,60.185 58.166,60.185 ; 52.197,62.719 58.166,62.719 ; 52.197,65.253 58.166,65.253 ; 52.197,67.786 58.166,67.786 ; 52.197,75.387 58.166,75.387 ; 52.197,77.921 58.166,77.921 ; 52.197,80.454 58.166,80.454 ; 52.197,82.988 58.166,82.988 ; 52.197,85.522 58.166,85.522 ; 52.197,88.055 58.166,88.055 ; 52.197,90.589 58.166,90.589 ; 52.197,93.123 58.166,93.123 ; 52.197,98.19 58.166,98.19 ; 52.197,100.724 58.166,100.724 ; 52.197,103.257 58.166,103.257 ; 54.991,105.791 52.197,105.791 ; 55.181,55.118 55.181,105.791 ; 108.585,62.357 108.585,59.563 ; 108.585,62.547 128.854,62.547 ; 111.119,59.563 111.119,65.532 ; 113.652,59.563 113.652,65.532 ; 116.186,59.563 116.186,65.532 ; 121.253,59.563 121.253,65.532 ; 123.787,59.563 123.787,65.532 ; 126.321,59.563 126.321,65.532 ; 137.668,57.652 143.637,57.652 ; 137.668,60.185 143.637,60.185 ; 137.668,62.719 143.637,62.719 ; 137.668,65.253 143.637,65.253 ; 137.668,67.786 143.637,67.786 ; 137.668,75.387 143.637,75.387 ; 137.668,77.921 143.637,77.921 ; 137.668,80.454 143.637,80.454 ; 137.668,82.988 143.637,82.988 ; 140.652,55.118 140.652,85.522 ; 52.197,105.791 52.197,55.118 58.166,55.118 58.166,105.791 52.197,105.791 ; 108.585,59.563 108.585,65.532 128.854,65.532 128.854,59.563 108.585,59.563 ; 52.197,70.32 58.166,70.32 52.197,70.32 ; 52.197,72.854 58.166,72.854 52.197,72.854 ; 52.197,95.656 58.166,95.656 52.197,95.656 ; 118.72,59.563 118.72,65.532 118.72,59.563 ; 137.668,55.118 143.637,55.118 143.637,85.522 137.668,85.522 137.668,55.118 ; 137.668,70.32 143.637,70.32 137.668,70.32 ; 137.668,72.854 143.637,72.854 137.668,72.854
  text "LCD 1.8 inch" at 67.687,115.062 h2
  text "OLED 2.4 inch" at 87.82,115.062 h2
  text "LCD 2.4 inch" at 110.426,115.062 h2
  text "ALl Displays to SPI3" at 104.902,109.855 h2
  text "RST -> PD0" at 104.902,107.882 h2
  text "DC -> PD1" at 104.902,105.91 h2
  text "PE3" at 52.374,104.013 h1.25
  text "PE2" at 55.372,104.013 h1.25
  text "CS -> PD2" at 104.902,103.937 h2
  text "BKL -> PD3" at 104.902,101.981 h2
  text "PE5" at 52.374,101.487 h1.25
  text "PE4" at 55.372,101.5 h1.25
  text "RESET" at 66.675,100.965 h2
  text "GND" at 135.45,100.7 h2
  text "BOOT0" at 98.298,100.584 h2
  text "PC13" at 52.374,98.948 h1.25
  text "PE6" at 55.372,98.969 h1.25
  text "+5V" at 135.85,96.875 h2
  text "PC15" at 52.374,96.409 h1.25
  text "PC14" at 55.372,96.428 h1.25
  text "PC1" at 52.374,93.869 h1.25
  text "PC0" at 55.372,93.887 h1.25
  text "+5V" at 135.166,92.863 h2
  text "PC3" at 52.374,91.33 h1.25
  text "PC2" at 55.372,91.346 h1.25
  text "3.3V" at 134.971,90.45 h2
  text "PA1" at 52.374,88.815 h1.25
  text "PA0" at 55.372,88.815 h1.25
  text "GND" at 134.823,87.783 h2
  text "PA2" at 55.372,86.298 h1.25
  text "PA3" at 52.374,86.286 h1.25
  text "LED(PC0)" at 64.77,85.725 h2
  text "PE1" at 137.825,83.9 h1.25
  text "PE0" at 140.825,83.9 h1.25
  text "PA4" at 55.372,83.785 h1.25
  text "PA5" at 52.374,83.76 h1.25
  text "PB9" at 137.825,81.358 h1.25
  text "PB8" at 140.825,81.356 h1.25
  text "PA7" at 52.374,81.248 h1.25
  text "PA6" at 55.372,81.254 h1.25
  text "SWDIO" at 114.427,78.867 h2 r90
  text "SWCLK" at 117.094,78.867 h2 r90
  text "RST" at 119.761,78.867 h2 r90
  text "GND" at 122.428,78.867 h2 r90
  text "PB7" at 137.825,78.832 h1.25
  text "PB6" at 140.825,78.812 h1.25
  text "PC5" at 52.374,78.709 h1.25
  text "PC4" at 55.372,78.713 h1.25
  text "PB5" at 137.825,76.294 h1.25
  text "PB4" at 140.825,76.285 h1.25
  text "PB1" at 52.374,76.194 h1.25
  text "PB0" at 55.372,76.183 h1.25
  text "PB3" at 137.825,73.751 h1.25
  text "PD7" at 140.825,73.759 h1.25
  text "PE7" at 52.374,73.682 h1.25
  text "PB2" at 55.372,73.666 h1.25
  text "PD5" at 140.825,71.218 h1.25
  text "PD6" at 137.825,71.209 h1.25
  text "PE9" at 52.374,71.153 h1.25
  text "PE8" at 55.372,71.135 h1.25
  text "PD4" at 137.825,68.684 h1.25
  text "PD3" at 140.825,68.674 h1.25
  text "PE11" at 52.374,68.638 h1.25
  text "PE10" at 55.372,68.605 h1.25
  text "PD2" at 137.825,66.155 h1.25
  text "PD1" at 140.825,66.144 h1.25
  text "PE13" at 52.374,66.109 h1.25
  text "PE12" at 55.372,66.088 h1.25
  text "PD0" at 137.825,63.613 h1.25
  text "PC12" at 140.825,63.59 h1.25
  text "PE15" at 52.374,63.58 h1.25
  text "PE14" at 55.372,63.571 h1.25
  text "PD9" at 110.1,62.7 h1.25 r90
  text "PD11" at 112.648,62.7 h1.25 r90
  text "PD13" at 115.21,62.7 h1.25 r90
  text "PD15" at 117.771,62.7 h1.25 r90
  text "PC7" at 120.343,62.7 h1.25 r90
  text "PC9" at 122.915,62.7 h1.25 r90
  text "PA9" at 125.477,62.7 h1.25 r90
  text "PA11" at 128.025,62.7 h1.25 r90
  text "PB11" at 52.374,61.065 h1.25
  text "PC11" at 137.825,61.06 h1.25
  text "PB10" at 55.372,61.041 h1.25
  text "PC10" at 140.825,61.035 h1.25
  text "PD8" at 110.1,59.7 h1.25 r90
  text "PD10" at 112.665,59.7 h1.25 r90
  text "PD12" at 115.217,59.7 h1.25 r90
  text "PD14" at 117.768,59.7 h1.25 r90
  text "PC6" at 120.344,59.7 h1.25 r90
  text "PC8" at 122.919,59.7 h1.25 r90
  text "PA8" at 125.485,59.7 h1.25 r90
  text "PA10" at 128.05,59.7 h1.25 r90
  text "PB13" at 52.374,58.536 h1.25
  text "PB12" at 55.372,58.524 h1.25
  text "PA15" at 137.825,58.517 h1.25
  text "PA14" at 140.825,58.505 h1.25
  text "PB15" at 52.374,56.007 h1.25
  text "PB14" at 55.372,56.007 h1.25
  text "PA13" at 137.825,55.975 h1.25
  text "PA12" at 140.825,55.975 h1.25
  text "DS18B20" at 58.674,55.372 h2
  text "Data" at 72.39,52.832 h2.5
  text "3.3V" at 78.105,52.832 h2.5
  text "GND" at 83.312,52.832 h2.5
  text "Data connected to PB10(USART3)" at 58.801,52.578 h1.5
  text "Data" at 57.658,39.116 h2.5 r90
  text "3.3V" at 62.728,39.116 h2.5 r90
  text "GND" at 67.818,39.116 h2.5 r90
  text "Data" at 75.658,39.116 h2.5 r90
  text "3.3V" at 80.728,39.116 h2.5 r90
  text "GND" at 85.818,39.116 h2.5 r90
  text "Data" at 93.658,39.116 h2.5 r90
  text "3.3V" at 98.728,39.116 h2.5 r90
  text "GND" at 103.818,39.116 h2.5 r90
  text "Data" at 111.658,39.116 h2.5 r90
  text "3.3V" at 116.728,39.116 h2.5 r90
  text "GND" at 121.818,39.116 h2.5 r90
  text "Data" at 129.658,39.116 h2.5 r90
  text "3.3V" at 134.728,39.116 h2.5 r90
  text "GND" at 139.818,39.116 h2.5 r90

## Text inside footprints (layer, text, board x,y; h text height)
p4: Mechanical 1 "PCB EDGE" at 131.763,117.064 h0.7